# EAGLE board EconomizerLT_v52_SMD_Micro_full (EAGLE 9.6.2), part 1 of 2
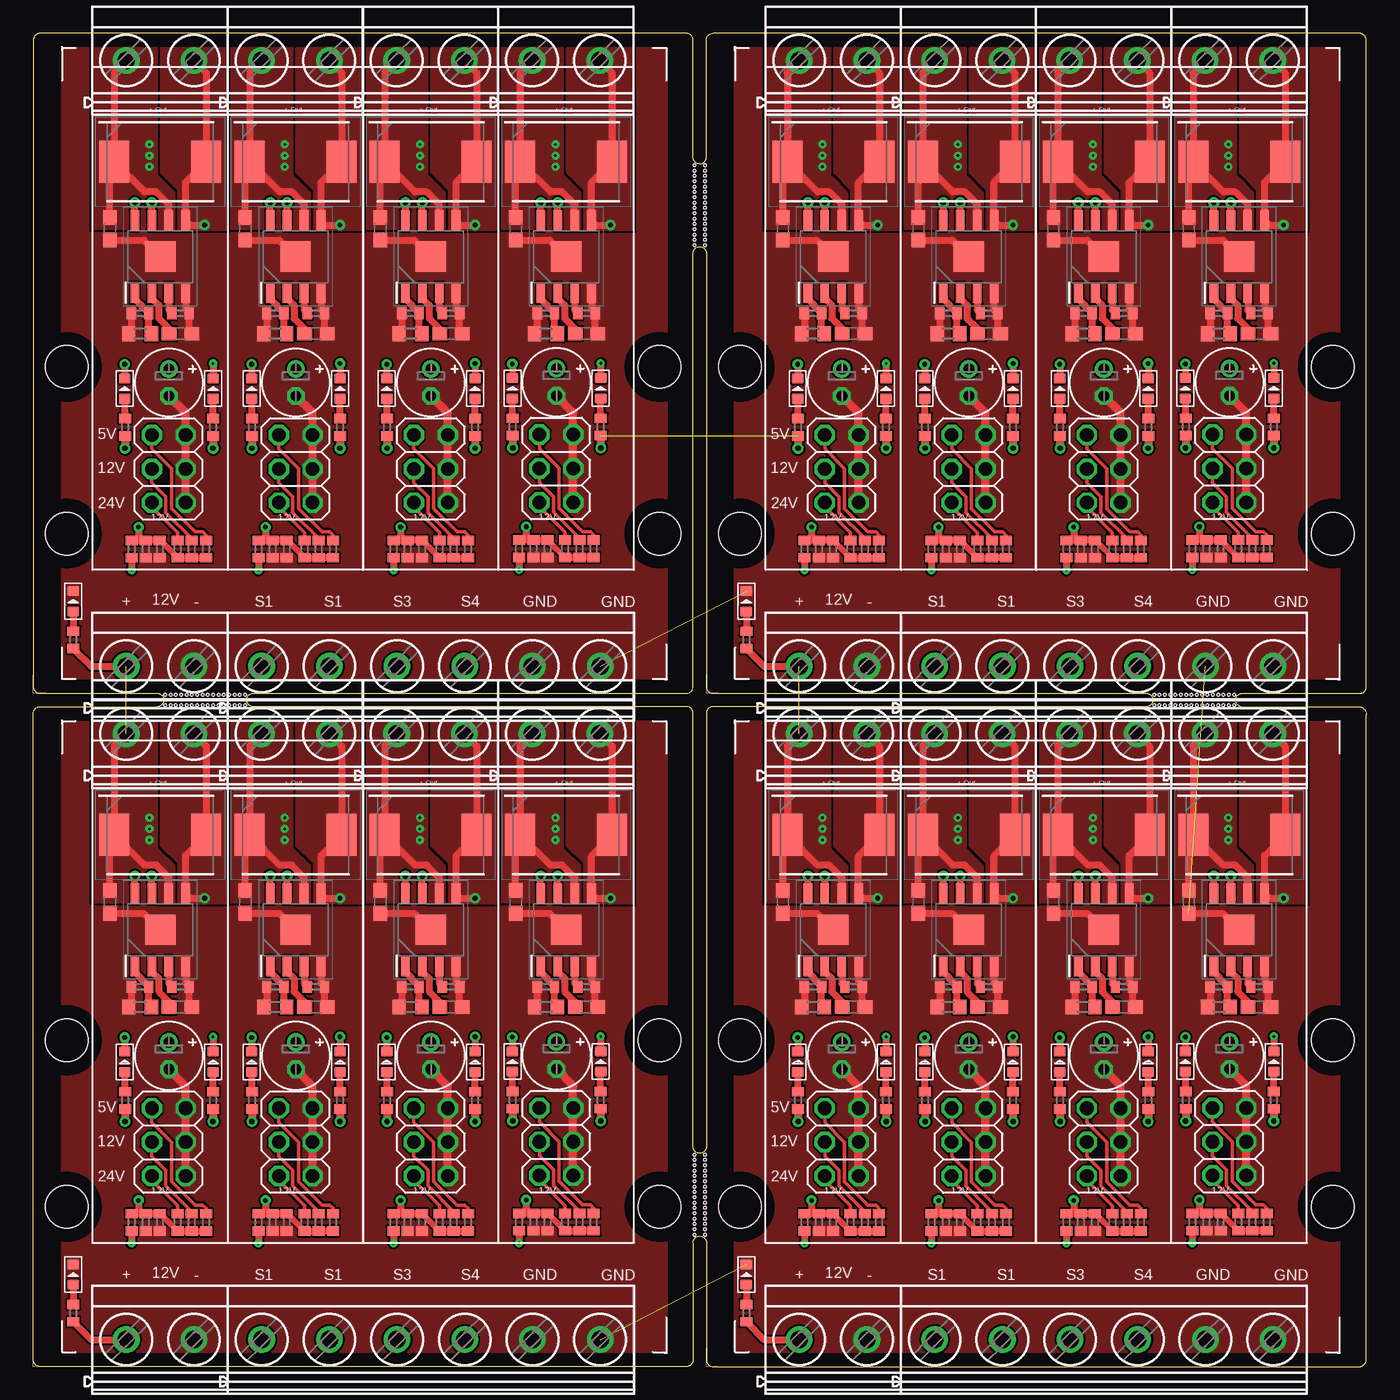
[diagram p0: board, top side]
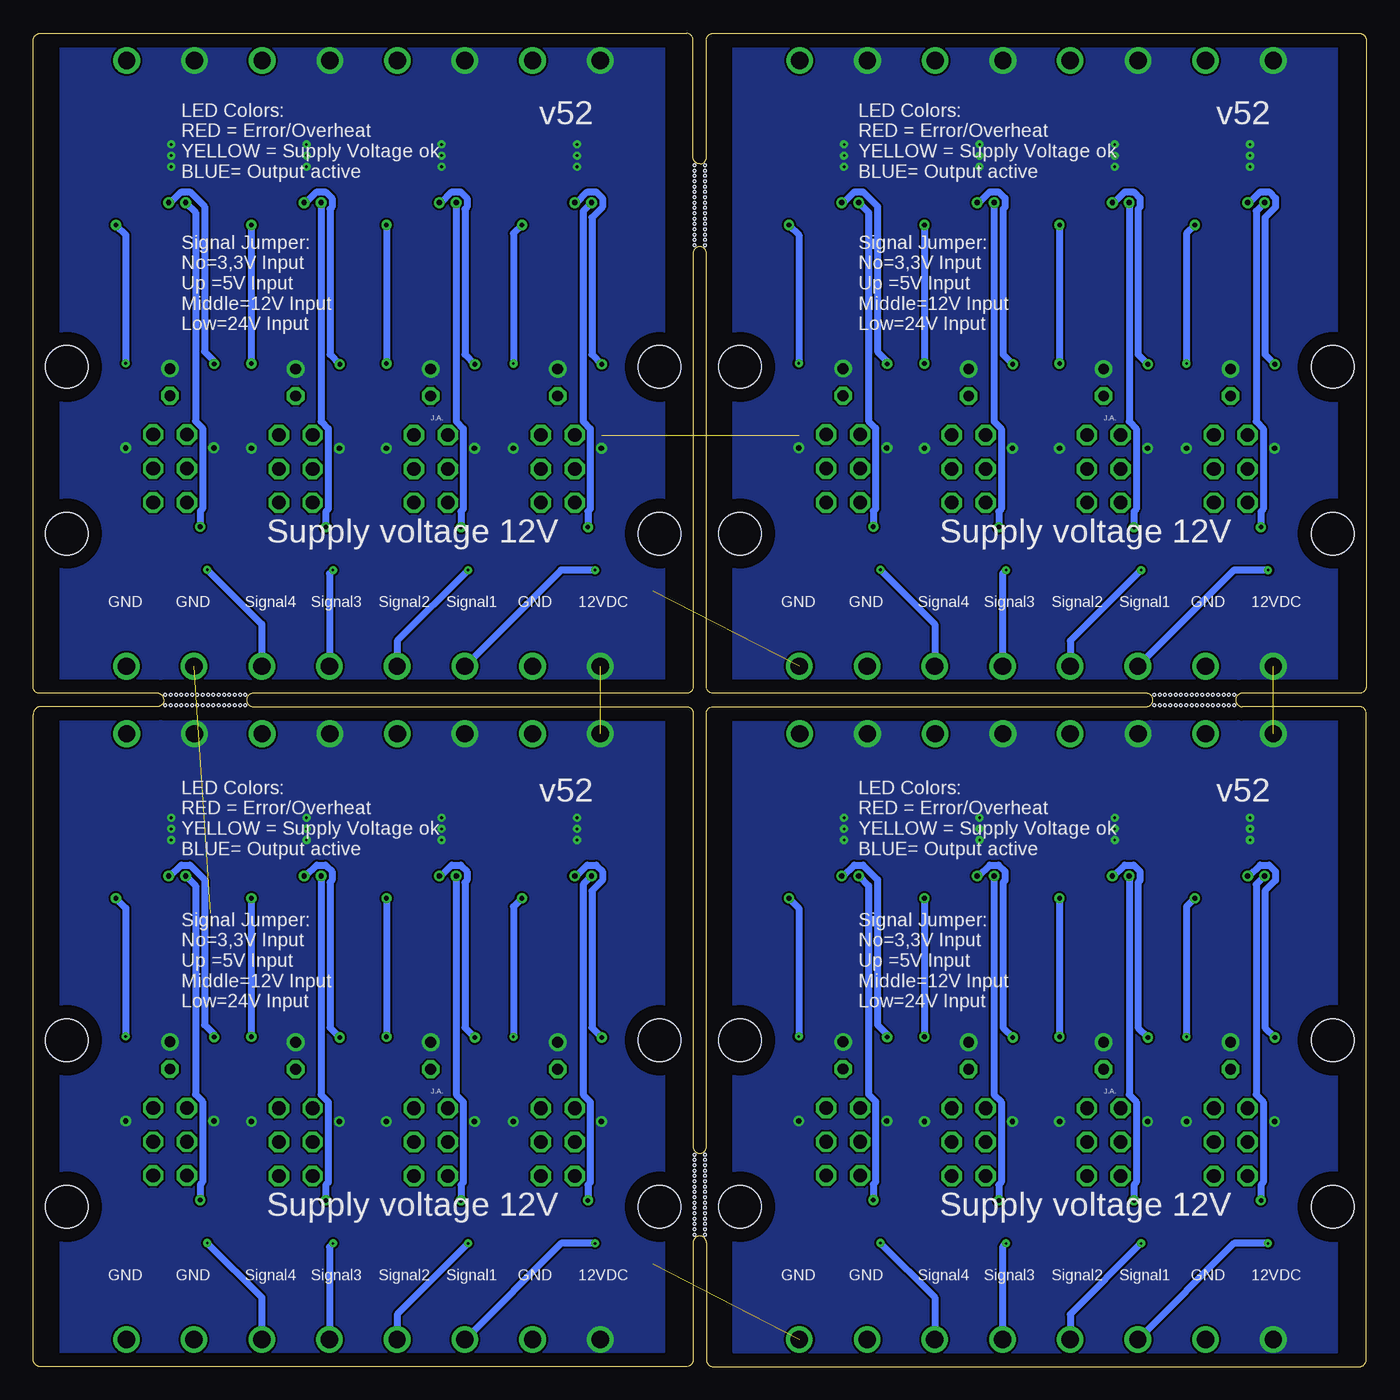
[diagram p1: board, bottom side, seen from below]

Size 100 x 100 mm. Coordinates in mm from the lower left corner, seen from the top.
Outline: 49.5,16.5 49.5,49 arc90 49,49.5 16.5,49.5 arc-90 16,50 arc-90 16.5,50.5 49,50.5 arc90 49.5,51 49.5,83.5 arc-90 50,84 arc-90 50.5,83.5 50.5,51 arc90 51,50.5 83.5,50.5 arc-90 84,50 arc-90 83.5,49.5 51,49.5 arc90 50.5,49 50.5,16.5 arc-90 50,16 arc-90 49.5,16.5
Outline: 9.8,50 arc-90 9.3,49.5 0.5,49.5 arc90 0,49 0,0.5 arc90 0.5,0 49,0 arc90 49.5,0.5 49.5,9.3 arc-90 50,9.8 arc-90 50.5,9.3 50.5,0.5 arc90 51,0 99.5,0 arc90 100,0.5 100,48.9 arc90 99.5,49.5 90.7,49.5 arc-90 90.2,50 arc-90 90.7,50.5 99.5,50.5 arc90 100,50.9 100,99.5 arc90 99.5,100 51,100 arc90 50.5,99.5 50.5,90.7 arc-90 50,90.2 arc-90 49.5,90.7 49.5,99.5 arc90 49,100 0.5,100 arc90 0,99.5 0,51 arc90 0.5,50.5 9.3,50.5 arc-90 9.8,50
Copper layers (1*16): Top 0.035mm / dielectric 1.5mm / Bottom 0.035mm
Design rules "default *": minimum track width 6mil, minimum drill 0.2mm, track to track 6mil, track to pad 6mil, pad to pad 6mil, via to via 6mil, smd to smd 6mil, copper to edge 40mil, drill to drill 6mil, minimum pad ring 10mil, minimum via ring 8mil, stop-mask expansion 4mil, vias tented up to drill 0mil, thermal gap 10mil
Holes 0.2 mm at 15.9,49.6 15.5,49.6 15.1,49.6 14.7,49.6 14.3,49.6 13.9,49.6 13.5,49.6 13.1,49.6 12.7,49.6 12.3,49.6 11.9,49.6 11.5,49.6 11.1,49.6 10.7,49.6 10.3,49.6 9.9,49.6 15.9,50.4 15.5,50.4 15.1,50.4 14.7,50.4 14.3,50.4 13.9,50.4 13.5,50.4 13.1,50.4 12.7,50.4 12.3,50.4 11.9,50.4 11.5,50.4 11.1,50.4 10.7,50.4 10.3,50.4 9.9,50.4 90.1,49.6 89.7,49.6 89.3,49.6 88.9,49.6 88.5,49.6 88.1,49.6 87.7,49.6 87.3,49.6 86.9,49.6 86.5,49.6 86.1,49.6 85.7,49.6 85.3,49.6 84.9,49.6 84.5,49.6 84.1,49.6 90.1,50.4 89.7,50.4 89.3,50.4 88.9,50.4 88.5,50.4 88.1,50.4 87.7,50.4 87.3,50.4 86.9,50.4 86.5,50.4 86.1,50.4 85.7,50.4 85.3,50.4 84.9,50.4 84.5,50.4 84.1,50.4 49.6,90.1 49.6,89.7 49.6,89.3 49.6,88.9 49.6,88.5 49.6,88.1 49.6,87.7 49.6,87.3 49.6,86.9 49.6,86.5 49.6,86.1 49.6,85.7 49.6,85.3 49.6,84.9 49.6,84.5 49.6,84.1 50.4,90.1 50.4,89.7 50.4,89.3 50.4,88.9 50.4,88.5 50.4,88.1 50.4,87.7 50.4,87.3 50.4,86.9 50.4,86.5 50.4,86.1 50.4,85.7 50.4,85.3 50.4,84.9 50.4,84.5 50.4,84.1 49.6,15.9 49.6,15.5 49.6,15.1 49.6,14.7 49.6,14.3 49.6,13.9 49.6,13.5 49.6,13.1 49.6,12.7 49.6,12.3 49.6,11.9 49.6,11.5 49.6,11.1 49.6,10.7 49.6,10.3 49.6,9.9 50.4,15.9 50.4,15.5 50.4,15.1 50.4,14.7 50.4,14.3 50.4,13.9 50.4,13.5 50.4,13.1 50.4,12.7 50.4,12.3 50.4,11.9 50.4,11.5 50.4,11.1 50.4,10.7 50.4,10.3 50.4,9.9

## Footprints (pad centres in the part's own frame; a part is rotated, then mirrored left to right if it is on the bottom)
C0402 = smd 0.7 x 0.9: 1 -0.65,0; 2 0.65,0
C0603 = smd 1.1 x 1: 1 -0.85,0; 2 0.85,0
E2-5 = drill 0.813 pad 1.27: + -1.016,0 | drill 0.813 pad 1.27 octagon: - 1.016,0
DIOM8059X261N = smd 2.25 x 3.15: 1 -3.45,0; 2 3.45,0
LED-0603 = smd 0.762 x 0.889: + -0.762,0; - 0.762,0
2X03 = drill 1.016 octagon: 1 -2.54,-1.27; 2 -2.54,1.27; 3 0,-1.27; 4 0,1.27; 5 2.54,-1.27; 6 2.54,1.27
R0402 = smd 0.7 x 0.9: 1 -0.65,0; 2 0.65,0
R0603 = smd 1 x 1.1: 1 -0.85,0; 2 0.85,0
SOIC127P600X170-9N = smd 1.525 x 0.65: 1 -2.712,1.905; 2 -2.712,0.635; 3 -2.712,-0.635; 4 -2.712,-1.905; 5 2.712,-1.905; 6 2.712,-0.635; 7 2.712,0.635; 8 2.712,1.905 | smd 2.28 x 2.28: 9 0,0
HUTSCHIENENHALTER = hole 3.2: 0,0; -12.5,0
MKDSN1,5/2-5,08 = drill 1.3 pad 2: 1 -2.561,0.025; 2 2.519,0.025
MKDSN1,5/6-5,08 = drill 1.3 pad 2: 1 -12.7,0.025; 2 -7.62,0.025; 3 -2.54,0.025; 4 2.54,0.025; 5 7.62,0.025; 6 12.7,0.025

## Placement (x,y rotation side)
C1  100pF  [C0402]  8,28.5 180 top
C2  100nF  [C0603]  11.05,26.97 0 top
C3  100uF  [E2-5]  10.17,23.32 270 top
C4  100nF  [C0603]  5.74,34.85 270 top
C8  33nF  [C0402]  9.5,10.82 270 top
C11  100nF  [C0603]  21.21,26.97 0 top
C12  100uF  [E2-5]  19.69,23.32 270 top
C13  100pF  [C0402]  18.16,28.5 180 top
C14  100nF  [C0603]  15.9,34.85 270 top
C15  33nF  [C0402]  19.02,10.82 270 top
C16  100nF  [C0603]  31.34,26.97 0 top
C17  100uF  [E2-5]  29.83,23.32 270 top
C18  100pF  [C0402]  28.3,28.5 180 top
C19  100nF  [C0603]  26.04,34.85 270 top
C20  33nF  [C0402]  29.16,10.82 270 top
C21  100nF  [C0603]  41.5,26.97 0 top
C22  100uF  [E2-5]  39.25,23.34 270 top
C23  100pF  [C0402]  38.46,28.5 180 top
C24  100nF  [C0603]  36.2,34.85 270 top
C25  33nF  [C0402]  38.58,10.85 270 top
C41  100nF  [C0603]  61.54,26.97 0 top
C42  100uF  [E2-5]  60.66,23.32 270 top
C43  100pF  [C0402]  58.5,28.5 180 top
C44  100nF  [C0603]  56.24,34.85 270 top
C45  33nF  [C0402]  59.99,10.82 270 top
C46  100nF  [C0603]  71.7,26.97 0 top
C47  100uF  [E2-5]  70.19,23.32 270 top
C48  100pF  [C0402]  68.66,28.5 180 top
C49  100nF  [C0603]  66.4,34.85 270 top
C50  33nF  [C0402]  69.52,10.82 270 top
C51  100nF  [C0603]  81.84,26.97 0 top
C52  100uF  [E2-5]  80.32,23.32 270 top
C53  100pF  [C0402]  78.79,28.5 180 top
C54  100nF  [C0603]  76.53,34.85 270 top
C55  33nF  [C0402]  79.65,10.82 270 top
C56  100nF  [C0603]  92,26.97 0 top
C57  100uF  [E2-5]  89.75,23.34 270 top
C58  100pF  [C0402]  88.95,28.5 180 top
C59  100nF  [C0603]  86.69,34.85 270 top
C60  33nF  [C0402]  89.08,10.85 270 top
C61  100nF  [C0603]  11.05,77.47 0 top
C62  100uF  [E2-5]  10.17,73.81 270 top
C63  100pF  [C0402]  8,78.99 180 top
C64  100nF  [C0603]  5.74,85.34 270 top
C65  33nF  [C0402]  9.5,61.32 270 top
C66  100nF  [C0603]  21.21,77.47 0 top
C67  100uF  [E2-5]  19.69,73.81 270 top
C68  100pF  [C0402]  18.16,78.99 180 top
C69  100nF  [C0603]  15.9,85.34 270 top
C70  33nF  [C0402]  19.02,61.32 270 top
C71  100nF  [C0603]  31.34,77.47 0 top
C72  100uF  [E2-5]  29.83,73.81 270 top
C73  100pF  [C0402]  28.3,78.99 180 top
C74  100nF  [C0603]  26.04,85.34 270 top
C75  33nF  [C0402]  29.16,61.32 270 top
C76  100nF  [C0603]  41.5,77.47 0 top
C77  100uF  [E2-5]  39.25,73.84 270 top
C78  100pF  [C0402]  38.46,78.99 180 top
C79  100nF  [C0603]  36.2,85.34 270 top
C80  33nF  [C0402]  38.58,61.34 270 top
C81  100nF  [C0603]  61.54,77.47 0 top
C82  100uF  [E2-5]  60.66,73.81 270 top
C83  100pF  [C0402]  58.5,78.99 180 top
C84  100nF  [C0603]  56.24,85.34 270 top
C85  33nF  [C0402]  59.99,61.32 270 top
C86  100nF  [C0603]  71.7,77.47 0 top
C87  100uF  [E2-5]  70.19,73.81 270 top
C88  100pF  [C0402]  68.66,78.99 180 top
C89  100nF  [C0603]  66.4,85.34 270 top
C90  33nF  [C0402]  69.52,61.32 270 top
C91  100nF  [C0603]  81.84,77.47 0 top
C92  100uF  [E2-5]  80.32,73.81 270 top
C93  100pF  [C0402]  78.79,78.99 180 top
C94  100nF  [C0603]  76.53,85.34 270 top
C95  33nF  [C0402]  79.65,61.32 270 top
C96  100nF  [C0603]  92,77.47 0 top
C97  100uF  [E2-5]  89.75,73.84 270 top
C98  100pF  [C0402]  88.95,78.99 180 top
C99  100nF  [C0603]  86.69,85.34 270 top
C100  33nF  [C0402]  89.08,61.34 270 top
D1  MURS360T3G  [DIOM8059X261N]  9.53,39.88 0 top
D2  KT-0603R  [LED-0603]  6.86,22.86 90 top
D3  19-213/Y2C-CQ2R2L/3T(CY)  [LED-0603]  3,6.91 90 top
D4  19-217/BHC-ZL1M2RY/3T  [LED-0603]  13.49,22.86 90 top
D8  MURS360T3G  [DIOM8059X261N]  19.68,39.88 0 top
D9  KT-0603R  [LED-0603]  16.38,22.86 90 top
D10  19-217/BHC-ZL1M2RY/3T  [LED-0603]  23.01,22.86 90 top
D11  MURS360T3G  [DIOM8059X261N]  29.82,39.88 0 top
D12  KT-0603R  [LED-0603]  26.52,22.86 90 top
D13  19-217/BHC-ZL1M2RY/3T  [LED-0603]  33.15,22.86 90 top
D14  MURS360T3G  [DIOM8059X261N]  39.98,39.88 0 top
D15  KT-0603R  [LED-0603]  35.94,22.89 90 top
D16  19-217/BHC-ZL1M2RY/3T  [LED-0603]  42.57,22.89 90 top
D27  MURS360T3G  [DIOM8059X261N]  60.02,39.88 0 top
D28  KT-0603R  [LED-0603]  57.35,22.86 90 top
D29  19-217/BHC-ZL1M2RY/3T  [LED-0603]  63.98,22.86 90 top
D30  19-213/Y2C-CQ2R2L/3T(CY)  [LED-0603]  53.49,6.91 90 top
D31  MURS360T3G  [DIOM8059X261N]  70.18,39.88 0 top
D32  KT-0603R  [LED-0603]  66.88,22.86 90 top
D33  19-217/BHC-ZL1M2RY/3T  [LED-0603]  73.51,22.86 90 top
D34  MURS360T3G  [DIOM8059X261N]  80.31,39.88 0 top
D35  KT-0603R  [LED-0603]  77.01,22.86 90 top
D36  19-217/BHC-ZL1M2RY/3T  [LED-0603]  83.64,22.86 90 top
D37  MURS360T3G  [DIOM8059X261N]  90.47,39.88 0 top
D38  KT-0603R  [LED-0603]  86.44,22.89 90 top
D39  19-217/BHC-ZL1M2RY/3T  [LED-0603]  93.07,22.89 90 top
D40  MURS360T3G  [DIOM8059X261N]  9.53,90.37 0 top
D41  KT-0603R  [LED-0603]  6.86,73.36 90 top
D42  19-217/BHC-ZL1M2RY/3T  [LED-0603]  13.49,73.36 90 top
D43  19-213/Y2C-CQ2R2L/3T(CY)  [LED-0603]  3,57.4 90 top
D44  MURS360T3G  [DIOM8059X261N]  19.68,90.37 0 top
D45  KT-0603R  [LED-0603]  16.38,73.36 90 top
D46  19-217/BHC-ZL1M2RY/3T  [LED-0603]  23.01,73.36 90 top
D47  MURS360T3G  [DIOM8059X261N]  29.82,90.37 0 top
D48  KT-0603R  [LED-0603]  26.52,73.36 90 top
D49  19-217/BHC-ZL1M2RY/3T  [LED-0603]  33.15,73.36 90 top
D50  MURS360T3G  [DIOM8059X261N]  39.98,90.37 0 top
D51  KT-0603R  [LED-0603]  35.94,73.38 90 top
D52  19-217/BHC-ZL1M2RY/3T  [LED-0603]  42.57,73.38 90 top
D53  MURS360T3G  [DIOM8059X261N]  60.02,90.37 0 top
D54  KT-0603R  [LED-0603]  57.35,73.36 90 top
D55  19-217/BHC-ZL1M2RY/3T  [LED-0603]  63.98,73.36 90 top
D56  19-213/Y2C-CQ2R2L/3T(CY)  [LED-0603]  53.49,57.4 90 top
D57  MURS360T3G  [DIOM8059X261N]  70.18,90.37 0 top
D58  KT-0603R  [LED-0603]  66.88,73.36 90 top
D59  19-217/BHC-ZL1M2RY/3T  [LED-0603]  73.51,73.36 90 top
D60  MURS360T3G  [DIOM8059X261N]  80.31,90.37 0 top
D61  KT-0603R  [LED-0603]  77.01,73.36 90 top
D62  19-217/BHC-ZL1M2RY/3T  [LED-0603]  83.64,73.36 90 top
D63  MURS360T3G  [DIOM8059X261N]  90.47,90.37 0 top
D64  KT-0603R  [LED-0603]  86.44,73.38 90 top
D65  19-217/BHC-ZL1M2RY/3T  [LED-0603]  93.07,73.38 90 top
JP2  [2X03]  10.16,16.84 90 top
JP3  [2X03]  19.68,16.84 90 top
JP4  [2X03]  29.82,16.84 90 top
JP5  [2X03]  39.24,16.87 90 top
JP9  [2X03]  60.66,16.84 90 top
JP10  [2X03]  70.18,16.84 90 top
JP11  [2X03]  80.31,16.84 90 top
JP12  [2X03]  89.74,16.87 90 top
JP13  [2X03]  10.16,67.34 90 top
JP14  [2X03]  19.68,67.34 90 top
JP15  [2X03]  29.82,67.34 90 top
JP16  [2X03]  39.24,67.36 90 top
JP17  [2X03]  60.66,67.34 90 top
JP18  [2X03]  70.18,67.34 90 top
JP19  [2X03]  80.31,67.34 90 top
JP20  [2X03]  89.74,67.36 90 top
R1  12k  [R0402]  7.37,10.82 270 top
R2  51k  [R0402]  12.95,10.82 270 top
R3  2k4  [R0402]  10.82,10.82 270 top
R4  6k8  [R0402]  11.89,10.82 270 top
R5  1k  [R0402]  3,4.01 270 top
R6  1k  [R0402]  13.49,19.96 270 top
R7  1M  [R0402]  8.43,10.82 90 top
R8  1k  [R0402]  6.88,19.96 270 top
R9  200k  [R0402]  11.05,28.51 0 top
R10  130k  [R0603]  8,26.97 180 top
R20  1k  [R0402]  16.41,19.96 270 top
R21  200k  [R0402]  21.21,28.51 0 top
R22  130k  [R0603]  18.16,26.97 180 top
R23  12k  [R0402]  16.89,10.82 270 top
R24  2k4  [R0402]  20.35,10.82 270 top
R25  6k8  [R0402]  21.41,10.82 270 top
R26  51k  [R0402]  22.48,10.82 270 top
R27  1k  [R0402]  23.01,19.96 270 top
R28  1M  [R0402]  17.96,10.82 90 top
R29  1k  [R0402]  26.54,19.96 270 top
R30  200k  [R0402]  31.34,28.51 0 top
R31  130k  [R0603]  28.3,26.97 180 top
R32  12k  [R0402]  27.03,10.82 270 top
R33  2k4  [R0402]  30.48,10.82 270 top
R34  6k8  [R0402]  31.55,10.82 270 top
R35  51k  [R0402]  32.61,10.82 270 top
R36  1k  [R0402]  33.15,19.96 270 top
R37  1M  [R0402]  28.09,10.82 90 top
R38  1k  [R0402]  35.97,19.99 270 top
R39  200k  [R0402]  41.5,28.51 0 top
R40  130k  [R0603]  38.46,26.97 180 top
R41  12k  [R0402]  36.45,10.85 270 top
R42  2k4  [R0402]  39.9,10.85 270 top
R43  6k8  [R0402]  40.97,10.85 270 top
R44  51k  [R0402]  42.04,10.85 270 top
R45  1k  [R0402]  42.57,19.99 270 top
R46  1M  [R0402]  37.52,10.85 90 top
R75  1k  [R0402]  57.38,19.96 270 top
R76  200k  [R0402]  61.54,28.51 0 top
R77  130k  [R0603]  58.5,26.97 180 top
R78  12k  [R0402]  57.86,10.82 270 top
R79  2k4  [R0402]  61.32,10.82 270 top
R80  6k8  [R0402]  62.38,10.82 270 top
R81  51k  [R0402]  63.45,10.82 270 top
R82  1k  [R0402]  63.98,19.96 270 top
R83  1M  [R0402]  58.93,10.82 90 top
R84  1k  [R0402]  53.49,4.01 270 top
R85  1k  [R0402]  66.9,19.96 270 top
R86  200k  [R0402]  71.7,28.51 0 top
R87  130k  [R0603]  68.66,26.97 180 top
R88  12k  [R0402]  67.39,10.82 270 top
R89  2k4  [R0402]  70.84,10.82 270 top
R90  6k8  [R0402]  71.91,10.82 270 top
R91  51k  [R0402]  72.97,10.82 270 top
R92  1k  [R0402]  73.51,19.96 270 top
R93  1M  [R0402]  68.45,10.82 90 top
R94  1k  [R0402]  77.04,19.96 270 top
R95  200k  [R0402]  81.84,28.51 0 top
R96  130k  [R0603]  78.79,26.97 180 top
R97  12k  [R0402]  77.52,10.82 270 top
R98  2k4  [R0402]  80.98,10.82 270 top
R99  6k8  [R0402]  82.04,10.82 270 top
R100  51k  [R0402]  83.11,10.82 270 top
R101  1k  [R0402]  83.64,19.96 270 top
R102  1M  [R0402]  78.59,10.82 90 top
R103  1k  [R0402]  86.46,19.99 270 top
R104  200k  [R0402]  92,28.51 0 top
R105  130k  [R0603]  88.95,26.97 180 top
R106  12k  [R0402]  86.94,10.85 270 top
R107  2k4  [R0402]  90.4,10.85 270 top
R108  6k8  [R0402]  91.47,10.85 270 top
R109  51k  [R0402]  92.53,10.85 270 top
R110  1k  [R0402]  93.07,19.99 270 top
R111  1M  [R0402]  88.01,10.85 90 top
R112  1k  [R0402]  6.88,70.46 270 top
R113  200k  [R0402]  11.05,79 0 top
R114  130k  [R0603]  8,77.47 180 top
R115  12k  [R0402]  7.37,61.32 270 top
R116  2k4  [R0402]  10.82,61.32 270 top
R117  6k8  [R0402]  11.89,61.32 270 top
R118  51k  [R0402]  12.95,61.32 270 top
R119  1k  [R0402]  13.49,70.46 270 top
R120  1M  [R0402]  8.43,61.32 90 top
R121  1k  [R0402]  3,54.51 270 top
R122  1k  [R0402]  16.41,70.46 270 top
R123  200k  [R0402]  21.21,79 0 top
R124  130k  [R0603]  18.16,77.47 180 top
R125  12k  [R0402]  16.89,61.32 270 top
R126  2k4  [R0402]  20.35,61.32 270 top
R127  6k8  [R0402]  21.41,61.32 270 top
R128  51k  [R0402]  22.48,61.32 270 top
R129  1k  [R0402]  23.01,70.46 270 top
R130  1M  [R0402]  17.96,61.32 90 top
R131  1k  [R0402]  26.54,70.46 270 top
R132  200k  [R0402]  31.34,79 0 top
R133  130k  [R0603]  28.3,77.47 180 top
R134  12k  [R0402]  27.03,61.32 270 top
R135  2k4  [R0402]  30.48,61.32 270 top
R136  6k8  [R0402]  31.55,61.32 270 top
R137  51k  [R0402]  32.61,61.32 270 top
R138  1k  [R0402]  33.15,70.46 270 top
R139  1M  [R0402]  28.09,61.32 90 top
R140  1k  [R0402]  35.97,70.48 270 top
R141  200k  [R0402]  41.5,79 0 top
R142  130k  [R0603]  38.46,77.47 180 top
R143  12k  [R0402]  36.45,61.34 270 top
R144  2k4  [R0402]  39.9,61.34 270 top
R145  6k8  [R0402]  40.97,61.34 270 top
R146  51k  [R0402]  42.04,61.34 270 top
R147  1k  [R0402]  42.57,70.48 270 top
R148  1M  [R0402]  37.52,61.34 90 top
R149  1k  [R0402]  57.38,70.46 270 top
R150  200k  [R0402]  61.54,79 0 top
R151  130k  [R0603]  58.5,77.47 180 top
R152  12k  [R0402]  57.86,61.32 270 top
R153  2k4  [R0402]  61.32,61.32 270 top
R154  6k8  [R0402]  62.38,61.32 270 top
R155  51k  [R0402]  63.45,61.32 270 top
R156  1k  [R0402]  63.98,70.46 270 top
R157  1M  [R0402]  58.93,61.32 90 top
R158  1k  [R0402]  53.49,54.51 270 top
R159  1k  [R0402]  66.9,70.46 270 top
R160  200k  [R0402]  71.7,79 0 top
R161  130k  [R0603]  68.66,77.47 180 top
R162  12k  [R0402]  67.39,61.32 270 top
R163  2k4  [R0402]  70.84,61.32 270 top
R164  6k8  [R0402]  71.91,61.32 270 top
R165  51k  [R0402]  72.97,61.32 270 top
R166  1k  [R0402]  73.51,70.46 270 top
R167  1M  [R0402]  68.45,61.32 90 top
R168  1k  [R0402]  77.04,70.46 270 top
R169  200k  [R0402]  81.84,79 0 top
R170  130k  [R0603]  78.79,77.47 180 top
R171  12k  [R0402]  77.52,61.32 270 top
R172  2k4  [R0402]  80.98,61.32 270 top
R173  6k8  [R0402]  82.04,61.32 270 top
R174  51k  [R0402]  83.11,61.32 270 top
R175  1k  [R0402]  83.64,70.46 270 top
R176  1M  [R0402]  78.59,61.32 90 top
R177  1k  [R0402]  86.46,70.48 270 top
R178  200k  [R0402]  92,79 0 top
R179  130k  [R0603]  88.95,77.47 180 top
R180  12k  [R0402]  86.94,61.34 270 top
R181  2k4  [R0402]  90.4,61.34 270 top
R182  6k8  [R0402]  91.47,61.34 270 top
R183  51k  [R0402]  92.53,61.34 270 top
R184  1k  [R0402]  93.07,70.48 270 top
R185  1M  [R0402]  88.01,61.34 90 top
U2  DRV103H  [SOIC127P600X170-9N]  9.53,32.77 90 top
U3  DRV103H  [SOIC127P600X170-9N]  19.68,32.77 90 top
U4  DRV103H  [SOIC127P600X170-9N]  29.82,32.77 90 top
U5  DRV103H  [SOIC127P600X170-9N]  39.98,32.77 90 top
U9  DRV103H  [SOIC127P600X170-9N]  60.02,32.77 90 top
U10  DRV103H  [SOIC127P600X170-9N]  70.18,32.77 90 top
U11  DRV103H  [SOIC127P600X170-9N]  80.31,32.77 90 top
U12  DRV103H  [SOIC127P600X170-9N]  90.47,32.77 90 top
U13  DRV103H  [SOIC127P600X170-9N]  9.53,83.26 90 top
U14  DRV103H  [SOIC127P600X170-9N]  19.68,83.26 90 top
U15  DRV103H  [SOIC127P600X170-9N]  29.82,83.26 90 top
U16  DRV103H  [SOIC127P600X170-9N]  39.98,83.26 90 top
U17  DRV103H  [SOIC127P600X170-9N]  60.02,83.26 90 top
U18  DRV103H  [SOIC127P600X170-9N]  70.18,83.26 90 top
U19  DRV103H  [SOIC127P600X170-9N]  80.31,83.26 90 top
U20  DRV103H  [SOIC127P600X170-9N]  90.47,83.26 90 top
U$1  HUTSCHIENENHALTER  [HUTSCHIENENHALTER]  46.99,24.49 90 top
U$2  HUTSCHIENENHALTER  [HUTSCHIENENHALTER]  2.51,24.49 90 top
U$5  HUTSCHIENENHALTER  [HUTSCHIENENHALTER]  97.49,24.49 90 top
U$6  HUTSCHIENENHALTER  [HUTSCHIENENHALTER]  53.01,24.49 90 top
U$7  HUTSCHIENENHALTER  [HUTSCHIENENHALTER]  46.99,74.98 90 top
U$8  HUTSCHIENENHALTER  [HUTSCHIENENHALTER]  2.51,74.98 90 top
U$9  HUTSCHIENENHALTER  [HUTSCHIENENHALTER]  97.49,74.98 90 top
U$10  HUTSCHIENENHALTER  [HUTSCHIENENHALTER]  53.01,74.98 90 top
X1  MKDSN1,5/2-5,08  [MKDSN1,5/2-5,08]  9.53,2.01 0 top
X2  MKDSN1,5/6-5,08  [MKDSN1,5/6-5,08]  29.83,2.01 0 top
X3  MKDSN1,5/2-5,08  [MKDSN1,5/2-5,08]  9.53,47.45 0 top
X5  MKDSN1,5/2-5,08  [MKDSN1,5/2-5,08]  19.68,47.45 0 top
X6  MKDSN1,5/2-5,08  [MKDSN1,5/2-5,08]  29.82,47.45 0 top
X7  MKDSN1,5/2-5,08  [MKDSN1,5/2-5,08]  39.98,47.45 0 top
X13  MKDSN1,5/2-5,08  [MKDSN1,5/2-5,08]  60.02,2.01 0 top
X14  MKDSN1,5/6-5,08  [MKDSN1,5/6-5,08]  80.32,2.01 0 top
X15  MKDSN1,5/2-5,08  [MKDSN1,5/2-5,08]  60.02,47.45 0 top
X16  MKDSN1,5/2-5,08  [MKDSN1,5/2-5,08]  70.18,47.45 0 top
X17  MKDSN1,5/2-5,08  [MKDSN1,5/2-5,08]  80.31,47.45 0 top
X18  MKDSN1,5/2-5,08  [MKDSN1,5/2-5,08]  90.47,47.45 0 top
X19  MKDSN1,5/2-5,08  [MKDSN1,5/2-5,08]  9.53,52.5 0 top
X20  MKDSN1,5/6-5,08  [MKDSN1,5/6-5,08]  29.83,52.5 0 top
X21  MKDSN1,5/2-5,08  [MKDSN1,5/2-5,08]  9.53,97.94 0 top
X22  MKDSN1,5/2-5,08  [MKDSN1,5/2-5,08]  19.68,97.94 0 top
X23  MKDSN1,5/2-5,08  [MKDSN1,5/2-5,08]  29.82,97.94 0 top
X24  MKDSN1,5/2-5,08  [MKDSN1,5/2-5,08]  39.98,97.94 0 top
X25  MKDSN1,5/2-5,08  [MKDSN1,5/2-5,08]  60.02,52.5 0 top
X26  MKDSN1,5/6-5,08  [MKDSN1,5/6-5,08]  80.32,52.5 0 top
X27  MKDSN1,5/2-5,08  [MKDSN1,5/2-5,08]  60.02,97.94 0 top
X28  MKDSN1,5/2-5,08  [MKDSN1,5/2-5,08]  70.18,97.94 0 top
X29  MKDSN1,5/2-5,08  [MKDSN1,5/2-5,08]  80.31,97.94 0 top
X30  MKDSN1,5/2-5,08  [MKDSN1,5/2-5,08]  90.47,97.94 0 top

## Library data of the parts
C1-C4 C8 C11-C25 C41-C100 R1-R10 R20-R46 R75-R185 = rcl
D1 D8 D11 D14 D27 D31 D34 D37 D40 D44 D47 D50 D53 D57 D60 D63 = SamacSys_Parts; DESCRIPTION: Rectifier 3A 600V Ultrafast 75ns SMC ON Semiconductor MURS360T3G Rectifier Diode, 4A, 600V, 2-Pin SMC; HEIGHT: 2.61mm; MANUFACTURER_NAME: ON Semiconductor; MANUFACTURER_PART_NUMBER: MURS360T3G; MOUSER_PART_NUMBER: 863-MURS360T3G; MOUSER_PRICE-STOCK: https://www.mouser.co.uk/ProductDetail/ON-Semiconductor/MURS360T3G?qs=Gev%252BmEvV0iZjP8fPE8409A%3D%3D
D2-D4 D9 D10 D12 D13 D15 D16 D28-D30 D32 D33 D35 D36 D38 D39 D41-D43 D45 D46 D48 D49 D51 D52 D54-D56 D58 D59 D61 D62 D64 D65 = SMD-LED-CLEAR-BLUE_0603_; AVAILABILITY: Bad; DESCRIPTION: Blue LED Indication - Discrete 2.8V 0603 (1608 Metric); MF: Everlight; MP: 19-217/BHC-ZL1M2RY/3T; PACKAGE: 0603 Everlight; PRICE: None
JP2-JP5 JP9-JP20 = pinhead
U2-U5 U9-U20 = SamacSys_Parts; DESCRIPTION: PWM Low-Side Driver 3A for Coils HSOP8 DRV103H, MOSFET Power Driver, 1.5A, Non-Inverting, 8 ??? 32 V, 8-Pin SO PowerPAD; HEIGHT: 1.7mm; MANUFACTURER_NAME: Texas Instruments; MANUFACTURER_PART_NUMBER: DRV103H; MOUSER_PART_NUMBER: 595-DRV103H; MOUSER_PRICE-STOCK: https://www.mouser.co.uk/ProductDetail/Texas-Instruments/DRV103H/?qs=VBduBm9rCJQEx63T3F6Ttg%3D%3D
U$1 U$2 U$5-U$10 = eigene_Bauteile
X1-X3 X5-X7 X13-X30 = con-phoenix-508

## Nets
12VDC: C3.+ C4.1 C12.+ C14.1 C17.+ C19.1 C22.+ C24.1 C42.+ C44.1 C47.+ C49.1 C52.+ C54.1 C57.+ C59.1 C62.+ C64.1 C67.+ C69.1 C72.+ C74.1 C77.+ C79.1 C82.+ C84.1 C87.+ C89.1 C92.+ C94.1 C97.+ C99.1 D1.1 D8.1 D11.1 D14.1 D27.1 D31.1 D34.1 D37.1 D40.1 D44.1 D47.1 D50.1 D53.1 D57.1 D60.1 D63.1 R5.2 R6.2 R8.2 R20.2 R27.2 R29.2 R36.2 R38.2 R45.2 R75.2 R82.2 R84.2 R85.2 R92.2 R94.2 R101.2 R103.2 R110.2 R112.2 R119.2 R121.2 R122.2 R129.2 R131.2 R138.2 R140.2 R147.2 R149.2 R156.2 R158.2 R159.2 R166.2 R168.2 R175.2 R177.2 R184.2 U2.6 U3.6 U4.6 U5.6 U9.6 U10.6 U11.6 U12.6 U13.6 U14.6 U15.6 U16.6 U17.6 U18.6 U19.6 U20.6 X1.1 X3.1 X5.1 X6.1 X7.1 X13.1 X15.1 X16.1 X17.1 X18.1 X19.1 X21.1 X22.1 X23.1 X24.1 X25.1 X27.1 X28.1 X29.1 X30.1
DELAY2: C2.1 U2.2
DELAY3: C11.1 U3.2
DELAY4: C16.1 U4.2
DELAY5: C21.1 U5.2
DELAY9: C41.1 U9.2
DELAY10: C46.1 U10.2
DELAY11: C51.1 U11.2
DELAY12: C56.1 U12.2
DELAY13: C61.1 U13.2
DELAY14: C66.1 U14.2
DELAY15: C71.1 U15.2
DELAY16: C76.1 U16.2
DELAY17: C81.1 U17.2
DELAY18: C86.1 U18.2
DELAY19: C91.1 U19.2
DELAY20: C96.1 U20.2
DUTYCYCLE2: C1.1 R10.1 U2.1
DUTYCYCLE3: C13.1 R22.1 U3.1
DUTYCYCLE4: C18.1 R31.1 U4.1
DUTYCYCLE5: C23.1 R40.1 U5.1
DUTYCYCLE9: C43.1 R77.1 U9.1
DUTYCYCLE10: C48.1 R87.1 U10.1
DUTYCYCLE11: C53.1 R96.1 U11.1
DUTYCYCLE12: C58.1 R105.1 U12.1
DUTYCYCLE13: C63.1 R114.1 U13.1
DUTYCYCLE14: C68.1 R124.1 U14.1
DUTYCYCLE15: C73.1 R133.1 U15.1
DUTYCYCLE16: C78.1 R142.1 U16.1
DUTYCYCLE17: C83.1 R151.1 U17.1
DUTYCYCLE18: C88.1 R161.1 U18.1
DUTYCYCLE19: C93.1 R170.1 U19.1
DUTYCYCLE20: C98.1 R179.1 U20.1
FREQ2: R9.1 U2.3
FREQ3: R21.1 U3.3
FREQ4: R30.1 U4.3
FREQ5: R39.1 U5.3
FREQ9: R76.1 U9.3
FREQ10: R86.1 U10.3
FREQ11: R95.1 U11.3
FREQ12: R104.1 U12.3
FREQ13: R113.1 U13.3
FREQ14: R123.1 U14.3
FREQ15: R132.1 U15.3
FREQ16: R141.1 U16.3
FREQ17: R150.1 U17.3
FREQ18: R160.1 U18.3
FREQ19: R169.1 U19.3
FREQ20: R178.1 U20.3
GND: C1.2 C2.2 C3.- C4.2 C8.2 C11.2 C12.- C13.2 C14.2 C15.2 C16.2 C17.- C18.2 C19.2 C20.2 C21.2 C22.- C23.2 C24.2 C25.2 C41.2 C42.- C43.2 C44.2 C45.2 C46.2 C47.- C48.2 C49.2 C50.2 C51.2 C52.- C53.2 C54.2 C55.2 C56.2 C57.- C58.2 C59.2 C60.2 C61.2 C62.- C63.2 C64.2 C65.2 C66.2 C67.- C68.2 C69.2 C70.2 C71.2 C72.- C73.2 C74.2 C75.2 C76.2 C77.- C78.2 C79.2 C80.2 C81.2 C82.- C83.2 C84.2 C85.2 C86.2 C87.- C88.2 C89.2 C90.2 C91.2 C92.- C93.2 C94.2 C95.2 C96.2 C97.- C98.2 C99.2 C100.2 D3.- D30.- D43.- D56.- JP2.1 JP2.3 JP2.5 JP3.1 JP3.3 JP3.5 JP4.1 JP4.3 JP4.5 JP5.1 JP5.3 JP5.5 JP9.1 JP9.3 JP9.5 JP10.1 JP10.3 JP10.5 JP11.1 JP11.3 JP11.5 JP12.1 JP12.3 JP12.5 JP13.1 JP13.3 JP13.5 JP14.1 JP14.3 JP14.5 JP15.1 JP15.3 JP15.5 JP16.1 JP16.3 JP16.5 JP17.1 JP17.3 JP17.5 JP18.1 JP18.3 JP18.5 JP19.1 JP19.3 JP19.5 JP20.1 JP20.3 JP20.5 R7.1 R9.2 R10.2 R21.2 R22.2 R28.1 R30.2 R31.2 R37.1 R39.2 R40.2 R46.1 R76.2 R77.2 R83.1 R86.2 R87.2 R93.1 R95.2 R96.2 R102.1 R104.2 R105.2 R111.1 R113.2 R114.2 R120.1 R123.2 R124.2 R130.1 R132.2 R133.2 R139.1 R141.2 R142.2 R148.1 R150.2 R151.2 R157.1 R160.2 R161.2 R167.1 R169.2 R170.2 R176.1 R178.2 R179.2 R185.1 U2.4 U2.9 U3.4 U3.9 U4.4 U4.9 U5.4 U5.9 U9.4 U9.9 U10.4 U10.9 U11.4 U11.9 U12.4 U12.9 U13.4 U13.9 U14.4 U14.9 U15.4 U15.9 U16.4 U16.9 U17.4 U17.9 U18.4 U18.9 U19.4 U19.9 U20.4 U20.9 X1.2 X2.5 X2.6 X13.2 X14.5 X14.6 X19.2 X20.5 X20.6 X25.2 X26.5 X26.6
N$1: D4.+ R6.1
N$2: D2.+ R8.1
N$3: D3.+ R5.1
N$7: R1.2 X2.1
N$8: JP2.2 R3.1
N$9: JP2.4 R4.1
N$10: JP2.6 R2.1
N$14: D9.+ R20.1
N$16: R23.2 X2.2
N$17: JP3.2 R24.1
N$18: JP3.4 R25.1
N$19: JP3.6 R26.1
N$21: D10.+ R27.1
N$22: D12.+ R29.1
N$23: R32.2 X2.3
N$24: JP4.2 R33.1
N$26: JP4.4 R34.1
N$27: JP4.6 R35.1
N$28: D13.+ R36.1
N$29: D15.+ R38.1
N$30: R41.2 X2.4
N$31: JP5.2 R42.1
N$32: JP5.4 R43.1
N$33: JP5.6 R44.1
N$34: D16.+ R45.1
N$54: D28.+ R75.1
N$55: R78.2 X14.1
N$56: JP9.2 R79.1
N$57: JP9.4 R80.1
N$58: JP9.6 R81.1
N$59: D30.+ R84.1
N$60: D29.+ R82.1
N$61: D32.+ R85.1
N$62: R88.2 X14.2
N$63: JP10.2 R89.1
N$64: JP10.4 R90.1
N$65: JP10.6 R91.1
N$66: D33.+ R92.1
N$67: D35.+ R94.1
N$68: R97.2 X14.3
N$69: JP11.2 R98.1
N$70: JP11.4 R99.1
N$71: JP11.6 R100.1
N$72: D36.+ R101.1
N$73: D38.+ R103.1
N$74: R106.2 X14.4
N$75: JP12.2 R107.1
N$76: JP12.4 R108.1
N$77: JP12.6 R109.1
N$78: D39.+ R110.1
N$79: D41.+ R112.1
N$80: R115.2 X20.1
N$81: JP13.2 R116.1
N$82: JP13.4 R117.1
N$83: JP13.6 R118.1
N$84: D43.+ R121.1
N$85: D42.+ R119.1
N$86: D45.+ R122.1
N$87: R125.2 X20.2
N$88: JP14.2 R126.1
N$89: JP14.4 R127.1
N$90: JP14.6 R128.1
N$91: D46.+ R129.1
N$92: D48.+ R131.1
N$93: R134.2 X20.3
N$94: JP15.2 R135.1
N$95: JP15.4 R136.1
N$96: JP15.6 R137.1
N$97: D49.+ R138.1
N$98: D51.+ R140.1
N$99: R143.2 X20.4
N$100: JP16.2 R144.1
N$101: JP16.4 R145.1
N$102: JP16.6 R146.1
N$103: D52.+ R147.1
N$104: D54.+ R149.1
N$105: R152.2 X26.1
N$106: JP17.2 R153.1
N$107: JP17.4 R154.1
N$108: JP17.6 R155.1
N$109: D56.+ R158.1
N$110: D55.+ R156.1
N$111: D58.+ R159.1
N$112: R162.2 X26.2
N$113: JP18.2 R163.1
N$114: JP18.4 R164.1
N$115: JP18.6 R165.1
N$116: D59.+ R166.1
N$117: D61.+ R168.1
N$118: R171.2 X26.3
N$119: JP19.2 R172.1
N$120: JP19.4 R173.1
N$121: JP19.6 R174.1
N$122: D62.+ R175.1
N$123: D64.+ R177.1
N$124: R180.2 X26.4
N$125: JP20.2 R181.1
N$126: JP20.4 R182.1
N$127: JP20.6 R183.1
N$128: D65.+ R184.1
OK2: D2.- U2.7
OK3: D9.- U3.7
OK4: D12.- U4.7
OK5: D15.- U5.7
OK9: D28.- U9.7
OK10: D32.- U10.7
OK11: D35.- U11.7
OK12: D38.- U12.7
OK13: D41.- U13.7
OK14: D45.- U14.7
OK15: D48.- U15.7
OK16: D51.- U16.7
OK17: D54.- U17.7
OK18: D58.- U18.7
OK19: D61.- U19.7
OK20: D64.- U20.7
ONSIGNAL2: C8.1 R1.1 R2.2 R3.2 R4.2 R7.2 U2.8
ONSIGNAL3: C15.1 R23.1 R24.2 R25.2 R26.2 R28.2 U3.8
ONSIGNAL4: C20.1 R32.1 R33.2 R34.2 R35.2 R37.2 U4.8
ONSIGNAL5: C25.1 R41.1 R42.2 R43.2 R44.2 R46.2 U5.8
ONSIGNAL9: C45.1 R78.1 R79.2 R80.2 R81.2 R83.2 U9.8
ONSIGNAL10: C50.1 R88.1 R89.2 R90.2 R91.2 R93.2 U10.8
ONSIGNAL11: C55.1 R97.1 R98.2 R99.2 R100.2 R102.2 U11.8
ONSIGNAL12: C60.1 R106.1 R107.2 R108.2 R109.2 R111.2 U12.8
ONSIGNAL13: C65.1 R115.1 R116.2 R117.2 R118.2 R120.2 U13.8
ONSIGNAL14: C70.1 R125.1 R126.2 R127.2 R128.2 R130.2 U14.8
ONSIGNAL15: C75.1 R134.1 R135.2 R136.2 R137.2 R139.2 U15.8
ONSIGNAL16: C80.1 R143.1 R144.2 R145.2 R146.2 R148.2 U16.8
ONSIGNAL17: C85.1 R152.1 R153.2 R154.2 R155.2 R157.2 U17.8
ONSIGNAL18: C90.1 R162.1 R163.2 R164.2 R165.2 R167.2 U18.8
ONSIGNAL19: C95.1 R171.1 R172.2 R173.2 R174.2 R176.2 U19.8
ONSIGNAL20: C100.1 R180.1 R181.2 R182.2 R183.2 R185.2 U20.8
OUT1: D1.2 D4.- U2.5 X3.2
OUT3: D8.2 D10.- U3.5 X5.2
OUT4: D11.2 D13.- U4.5 X6.2
OUT5: D14.2 D16.- U5.5 X7.2
OUT9: D27.2 D29.- U9.5 X15.2
OUT10: D31.2 D33.- U10.5 X16.2
OUT11: D34.2 D36.- U11.5 X17.2
OUT12: D37.2 D39.- U12.5 X18.2
OUT13: D40.2 D42.- U13.5 X21.2
OUT14: D44.2 D46.- U14.5 X22.2
OUT15: D47.2 D49.- U15.5 X23.2
OUT16: D50.2 D52.- U16.5 X24.2
OUT17: D53.2 D55.- U17.5 X27.2
OUT18: D57.2 D59.- U18.5 X28.2
OUT19: D60.2 D62.- U19.5 X29.2
OUT20: D63.2 D65.- U20.5 X30.2